# Altium PCB PCB1.PcbDoc
Units mil, origin at the board's own origin, x right, y up, seen from the top; angles counter-clockwise.
Board outline 3151.59 x 3151.59 mil, 2 copper layers (Top Layer, Bottom Layer); 25 components, 7 nets, 53 pads, 0 vias.
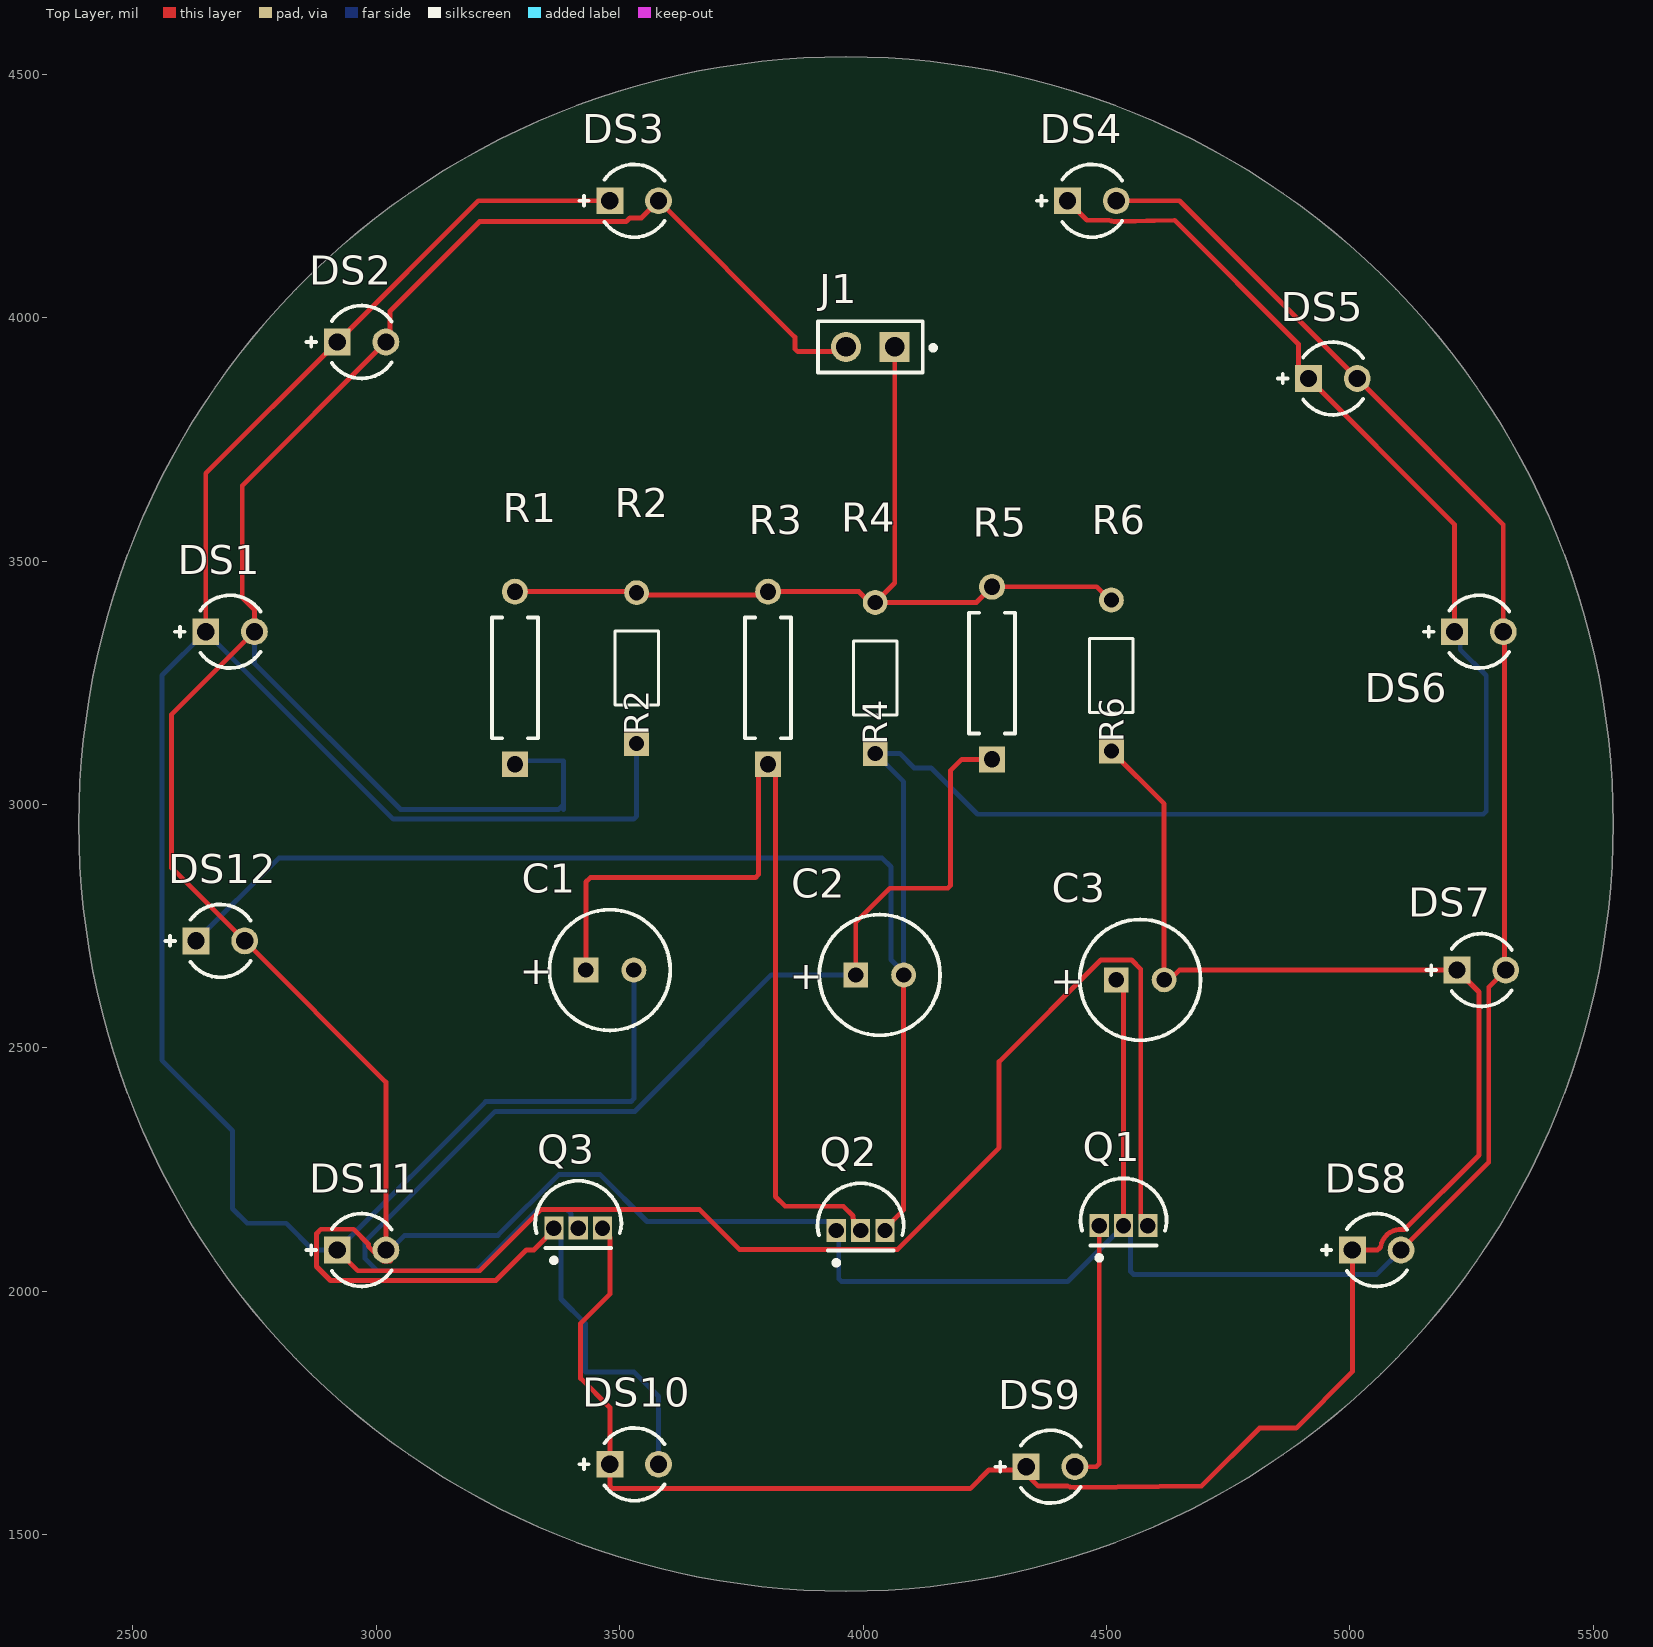
[diagram p0: Top Layer view]
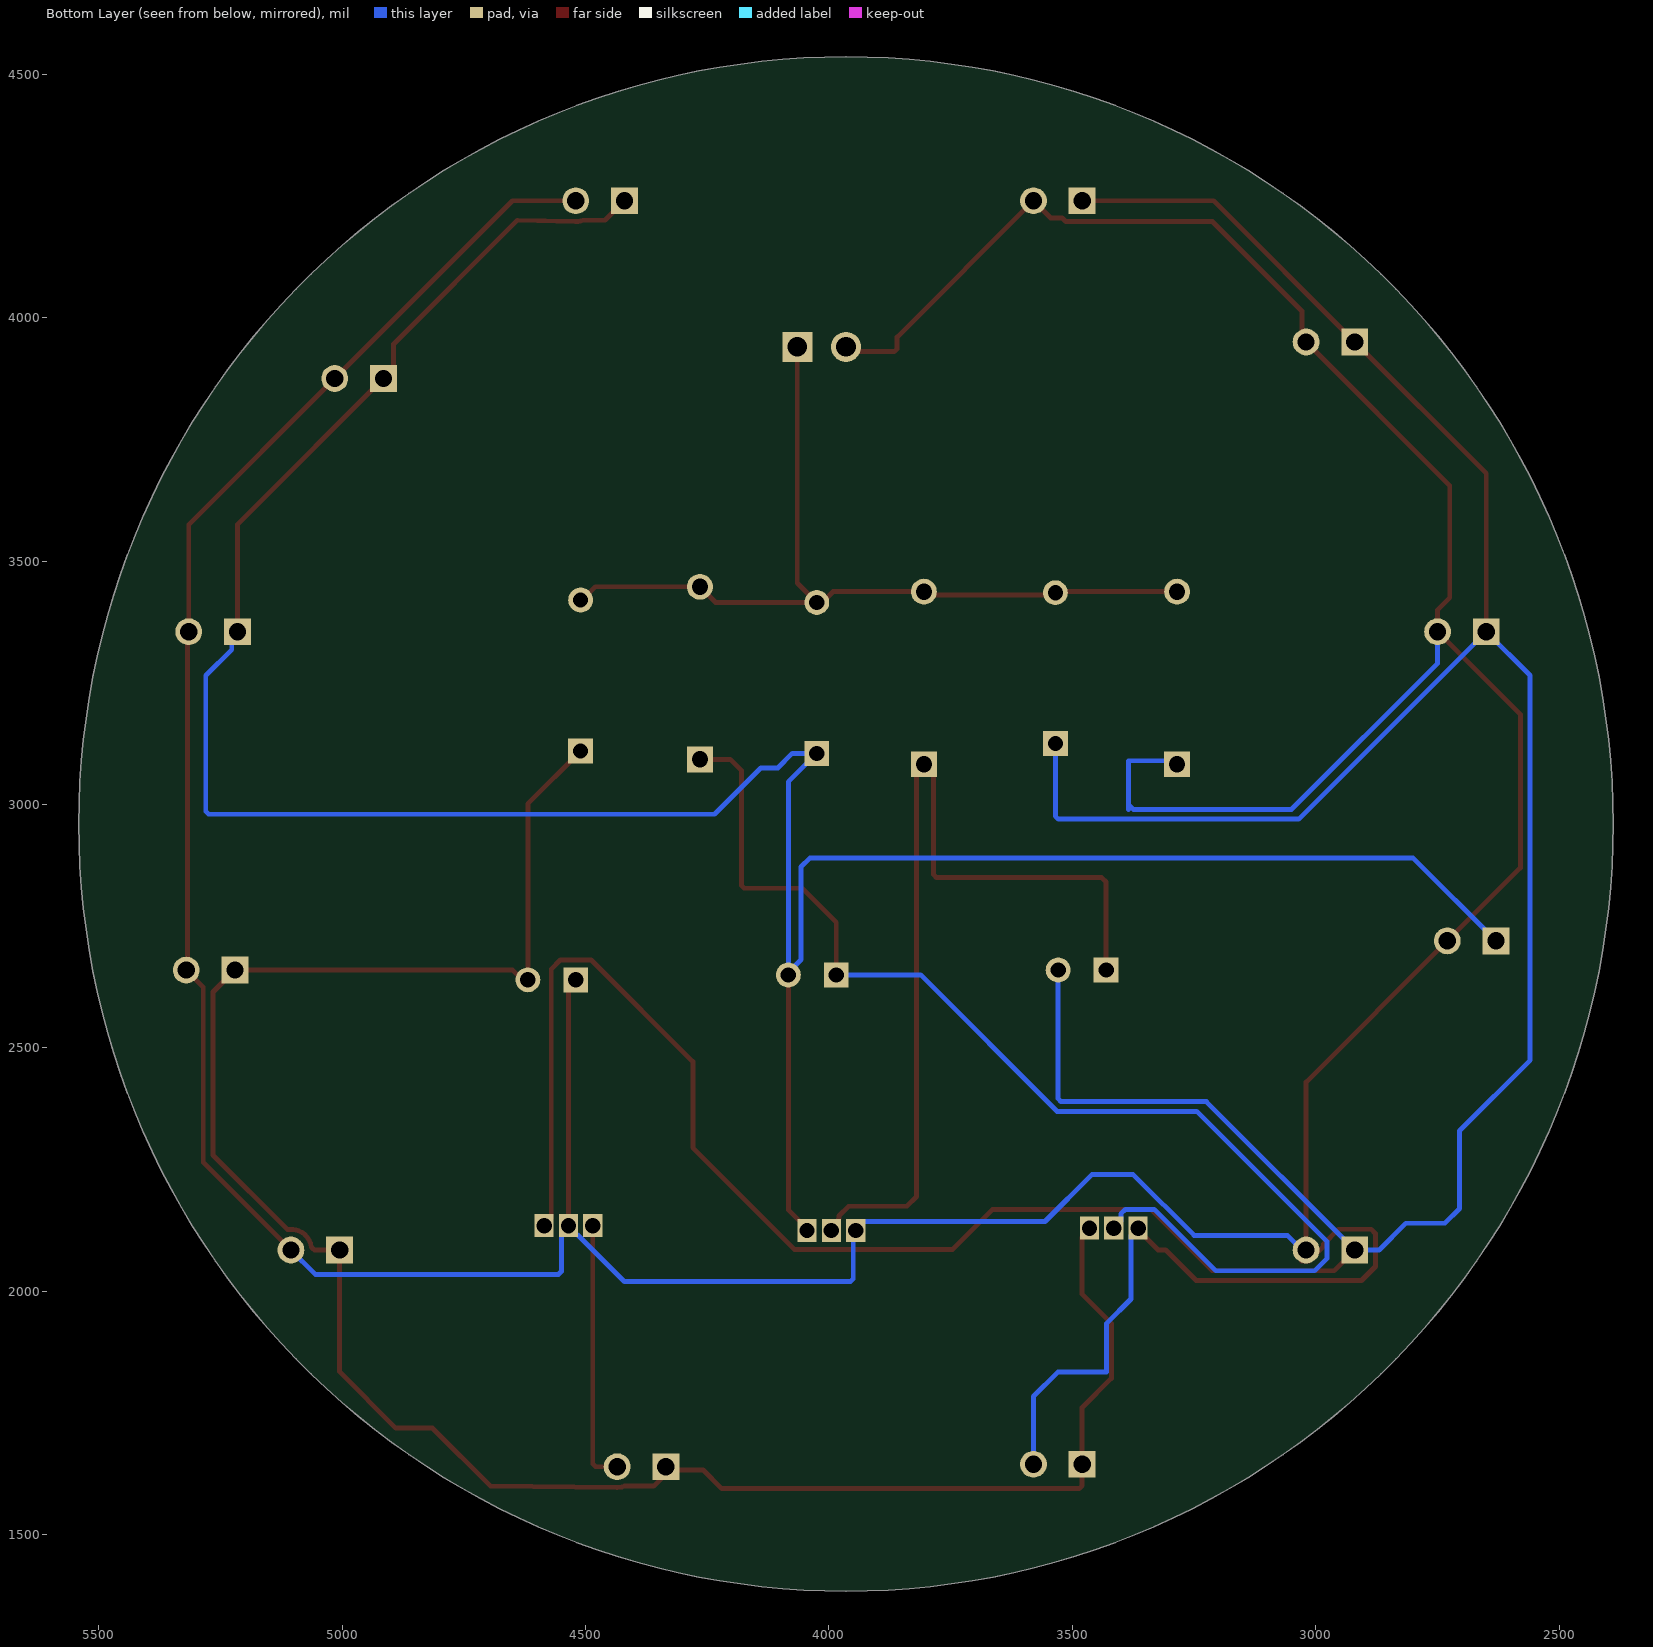
[diagram p1: Bottom Layer view, seen from below]

## Layer stack, top to bottom
Top Solder: solder mask 0.4, Solder Resist, Dk 3.5
Top Layer: signal copper 1.4
Dielectric 1: dielectric 12.6, FR-4, Dk 4.8
Bottom Layer: signal copper 1.4
Bottom Solder: solder mask 0.4, Solder Resist, Dk 3.5

## Board outline
2389.21,2960 ccw(c3965,2960) 3965,1384.21 ccw(c3965,2960) 5540.79,2960 ccw(c3965,2960) 3965,4535.79 ccw(c3965,2960)

## Design rules (kind name [scope] priority, off if disabled: settings)
Clearance [All] p1: gap=10 ignorepadtopadclearanceinfootprint=FALSE
PolygonConnect [All] p1: connectstyle=Relief reliefconductorwidth=10 reliefentries=4 polygonreliefangle="90 Angle" airgapwidth=10
RoutingVias [All] p1: holewidth=28 width=50 viastyle="Through Hole" minholewidth=28 minwidth=50 maxholewidth=28 maxwidth=50
SolderMaskExpansion [All] p1: expansion=0 istentingtop=FALSE
Width [All] p1: maxlimit=10 minlimit=10 preferedwidth=10
30 further rules are at their usual default settings.

## Components (designator, comment, footprint, x,y, rotation, side; value= is the part's Value field where it differs from the comment)
C1 "ECA-2AM220" CAPPR55-250-1120X630X1220 3480,2660 r0 top value=22µF
C2 "ECA-2AM220" CAPPR55-250-1120X630X1220 4034.21,2650 r0 top value=22µF
C3 "ECA-2AM220" CAPPR55-250-1120X630X1220 4569.21,2640 r0 top value=22µF
DS1 "LTL-1CHE" INDPR60-254-520X380X650 2700,3355 r0 top
DS2 "LTL-1CHE" INDPR60-254-520X380X650 2970,3950 r0 top
DS3 "LTL-1CHE" INDPR60-254-520X380X650 3530,4240 r0 top
DS4 "LTL-1CHE" INDPR60-254-520X380X650 4470,4240 r0 top
DS5 "LTL-1CHE" INDPR60-254-520X380X650 4965,3875 r0 top
DS6 "LTL-1CHE" INDPR60-254-520X380X650 5265,3355 r0 top
DS7 "LTL-1CHE" INDPR60-254-520X380X650 5270,2660 r0 top
DS8 "LTL-1CHE" INDPR60-254-520X380X650 5055,2085 r0 top
DS9 "LTL-1CHE" INDPR60-254-520X380X650 4385,1640 r0 top
DS10 "LTL-1CHE" INDPR60-254-520X380X650 3530,1645 r0 top
DS11 "LTL-1CHE" INDPR60-254-520X380X650 2970,2085 r0 top
DS12 "LTL-1CHE" INDPR60-254-520X380X650 2680,2720 r0 top
J1 "TSW-102-22-G-S" FP-TSW-102-22-G-S-MFG 4015,3940 r180 top
Q1 "S9013" JSCJ-TO-92-3_V 4535,2135 r0 top
Q2 "S9013" JSCJ-TO-92-3_V 3995,2125 r0 top
Q3 "S9013" JSCJ-TO-92-3_V 3415,2130 r0 top
R1 "MFR-25FBF52-10K" RESA60-630X240 3285,3260 r90 top value=10k
R2 "CF18JT330R" STA_CF18_STP 3535,3125 r90 top value=330
R3 "MFR-25FBF52-10K" RESA60-630X240 3805,3260 r90 top value=10k
R4 "CF18JT330R" STA_CF18_STP 4025,3105 r90 top value=330
R5 "MFR-25FBF52-10K" RESA60-630X240 4265,3270 r90 top value=10k
R6 "CF18JT330R" STA_CF18_STP 4510,3110 r90 top value=330

## Footprints (in the part's own frame and the unit in brackets; to place one, negate y for a bottom-side part, rotate by r counter-clockwise, add the part's x,y. Pads: shape width x height; smd on the part's side, far side on the other; paste and mask are expansions set on the pad)
CAPPR55-250-1120X630X1220 [mm] "THD, 2-Leads, Dia 6.3mm, Pin Spacing 2.5mm"
  rect 1.3x1.3 hole 0.8: 1(-1.25,0)
  round 1.3 hole 0.8: 2(1.25,0)
  silkscreen extent -3.15,-3.15 3.15,3.15, body extent -3.15,-3.15 3.16,3.15, height 12.21
FP-TSW-102-22-G-S-MFG [mm]
  rect 1.57x1.57 hole 1.02 paste-2539.97 mask+0: 1(-1.27,0)
  round 1.57 hole 1.02 paste-2539.97 mask+0: 2(1.27,0)
  silkscreen extent -3.4,-1.34 2.73,1.34, body extent -2.83,-1.44 2.83,1.44, height 0.25
INDPR60-254-520X380X650 [mm] "THD, 2-Leads, Dia 3.8mm, Pitch 2.54mm"
  rect 1.4x1.4 hole 0.9: 1(-1.27,0)
  round 1.4 hole 0.9: 2(1.27,0)
  silkscreen extent -2.87,-1.9 1.58,1.9, body extent -1.9,-1.9 1.9,1.9, height 6.5
JSCJ-TO-92-3_V [mm] "TO-92, 3-leads, Height 4.7mm, Pitch 1.27mm"
  rect 1x1.2 hole 0.8: 1(-1.27,0) 2(0,0) 3(1.27,0)
  silkscreen extent -2.25,-1.81 2.25,2.47, body extent -2.25,-1.03 2.25,2.47, height 4.7
RESA60-630X240 [mm] "Axial Resistor, 2-Leads, Dia 2.4mm, Body Length 6.3mm"
  rect 1.35x1.35 hole 0.85: 1(-4.5,0)
  round 1.35 hole 0.85: 2(4.5,0)
  silkscreen extent -3.15,-1.2 3.15,1.2, body extent -4.77,-1.19 4.77,1.2, height 2.4
STA_CF18_STP [mil]
  rect 51x51 hole 31 paste-99999 mask+0: 1(0,0)
  round 51 hole 31 paste-99999 mask+0: 2(310,0)
  silkscreen extent 79,-44 231,45, body extent -11,-39 321,39, height 79

## Part data
C1 C2 C3: library part CMP-001-00035-7, "Aluminum Electrolytic Capacitor, 22 uF, +/- 20%, 100 V, -40 to 85 degC, 2-Pin THD, RoHS, Bulk", Capacitor Type=Electrolytic, Case/Package=Radial, Manufacturer=Panasonic, Max Operating Temperature=85°C, Min Operating Temperature=-40°C, Package Description="2-Pin Radial Lead, Dia 6.3 mm, Height 12.2 mm", Package Quantity=200, Package Reference=CAPPR55-250-1120X630X1220, Ripple Current=115mA, Tolerance=20%, Voltage Rating=100V, Datasheet URL=https://industrial.panasonic.com/cdbs/www-data/pdf/RDF0000/ABA0000C1047.pdf, Datasheet Version=Mar-16, Diameter=6.3mm, Lead Pitch=2.5mm, Manufacturer URL=http://www.panasonic.com/, Mounting Technology=TH, Packaging=Bulk, Pins=2, Ripple Current (AC)=115mA, RoHS Compliant=True
DS1 DS2 DS3 DS4 DS5 DS6 DS7 DS8 DS9 DS10 DS11 DS12: library part CMP-007-00018-2, "LED Uni-Color Red, 100 mW, 30 mA, -55 to 100 degC, 2-Pin THD, RoHS, Bulk", Case/Package=Radial, Colour=Red, Forward Current=20mA, Forward Voltage=2V, Manufacturer=Lite-On, Max Operating Temperature=100°C, Min Operating Temperature=-55°C, Package Description="2-Pin Through Hole Device, Dia 3.8 mm, Pitch 2.54 mm", Package Quantity=1000, Datasheet URL=https://datasheet.ciiva.com/15117/getdatasheetpartid-187746-15117985.pdf, Datasheet Version=Dec-03, Illumination Colour=Red, Lens Style=Dome, Luminous Intensity=12.6mcd, Manufacturer URL=http://www.us.liteon.com/, Mounting Technology=TH, Nominal Vf=2V, Package Reference=LTL-1CHE, Packaging=Bulk, Pins=2, RoHS Compliant=True, Viewing Angle=60degrees
J1: library part CMP-002-00072-1, "TSW - Samtec 2.54mm Pin Header 16mm Overall Pin Length 7.62mm Tail (22) - Fast Stock(mcv)", Max Current Rating=7.6A, Max Operating Temperature=125°C, Min Operating Temperature=-55°C, Voltage Rating=550V, Gender=Male, Pins=2
Q1 Q2 Q3: library part CMP-013-00000-3, "Transistor, NPN, 0.1 uA, 150 MHz, 3-Pin TO-92", Case/Package=TO-92-3, Manufacturer="Jiangsu Changjiang Electronics Technology", Package Description="3-Pin Through Hole Device, Height 4.7 mm, Pitch 2.3 mm", Datasheet URL=http://www.cj-elec.com/txUpfile/20121910315050632.pdf, Datasheet Version="Rev. B, 11/2011", Mounting Technology=TH, Package Reference=TO-92-3, RoHS Compliant=False
R1 R3 R5: library part CMP-009-00047-4, "Axial Resistor, 10 KOhm, +/- 1%, 0.25 W, -55 to 155 degC, 2-Pin THD, RoHS, Bulk", Case/Package=Axial, Manufacturer=Yageo, Max Operating Temperature=155°C, Min Operating Temperature=-55°C, Package Description="2-Pin Axial Lead, Dia 2.4 mm, Body Length 6.3 mm", Package Quantity=200, Package Reference=MFR-25, Power=250mW, Tolerance=1%, Voltage Rating=250V, Datasheet URL=http://www.yageo.com/documents/recent/Yageo%20LR_MFR_2013.pdf, Datasheet Version=Apr-13, Manufacturer URL=http://www.yageo.com/, Mounting Technology=TH, Packaging=Bulk, RoHS Compliant=True
R2 R4 R6: library part CMP-009-00177-2, "Fixed Resistor, Carbon Film, 0.125W, 330ohm, 250V, 5% +/-Tol, -400, 0ppm/Cel, Through Hole Mount", Case/Package=Conformal, Max Operating Temperature=155°C, Min Operating Temperature=-55°C, Tolerance=5%, Mounting Technology="Axial, Through Hole"

## Nets (pads, with @x,y where several pads share a name; then routed paths per layer and width w, separated by ;. In a path a pad name is that pad's centre, name@x,y a point inside that pad or via, vN(x,y) a via of type N, cw(c..) or ccw(c..) an arc to the next point about the centre after c; other vN are vias at no path point)
NetC1_1: C1.1 Q2.2 R3.1 | length 1883.1
  Top Layer w10: C1.1 3430.79,2840.79 3440,2850 3779.14,2850 3785,2855.86 3785,3062.83 R3.1 3820,3067.83 3820,2195 3840,2175 3959.52,2175 3979.69,2154.84 3979.69,2149.48 3980.31,2148.85 3980.31,2139.69 Q2.2
NetC1_2: C1.2 DS1.1 DS2.1 DS3.1 DS11.1 Q1.3 R2.1 | length 7762.7
  Top Layer w10: DS1.1 2650,3680 DS2.1 3210,4240 DS3.1 ; DS11.1 2962.56,2042.44 3212.92,2042.44 3339.1,2168.62 3663.88,2168.62 3746.12,2086.38 4070.9,2086.38 4279.55,2295.03 4279.55,2471.94 4488.2,2680.59 4551.8,2680.59 4570.31,2662.08 4570.31,2149.69 Q1.3
  Bottom Layer w10: C1.2 3529.21,2395.65 3523.35,2389.79 3224.79,2389.79 DS11.1 2870,2085 2815,2140 2735,2140 2705,2170 2705,2330 2560,2475 2560,3265 DS1.1 3035,2970 3529.14,2970 3535,2975.86 R2.1
NetC2_1: C2.1 Q3.2 R5.1 | length 2459.2
  Top Layer w10: C2.1 3985,2758.07 4055,2828.07 4174.14,2828.07 4180,2833.93 4180,3070 4202.83,3092.83 R5.1
  Bottom Layer w10: Q3.2 3400.31,2144.69 3400.31,2159.21 3390.9,2168.62 3331.91,2168.62 3205.73,2042.44 3002.37,2042.44 2977.44,2067.37 2977.44,2102.63 3244.61,2369.79 3531.64,2369.79 3811.84,2650 C2.1
NetC2_2: C2.2 DS4.1 DS5.1 DS6.1 DS12.1 Q2.3 R4.1 | length 5783.4
  Top Layer w10: Q2.3 4045,2128.94 4083.43,2167.36 C2.2 ; DS4.1 4460,4200 4505.46,4200 ccw(c4520,4240) 4520.91,4197.45 4640,4200 4894.33,3945.67 4894.33,3895.67 5215,3575 DS6.1
  Bottom Layer w10: DS12.1 2800,2890 4039.14,2890 4057.34,2871.8 4057.34,2681.32 4083.43,2655.24 C2.2 4083.43,3046.57 R4.1 4075,3105 4105,3075 4140,3075 4235,2980 5274.14,2980 5280,2985.86 5280,3265 5226.7,3318.3 5226.7,3343.3 DS6.1
NetC3_1: C3.1 DS1.2 DS2.2 DS3.2 DS4.2 DS5.2 DS6.2 DS7.2 DS8.2 DS9.2 DS10.2 DS11.2 DS12.2 J1.2 Q1.1 Q1.2 Q2.1 Q3.1 R1.1 | length 12147.3
  Top Layer w10: Q3.1 3365,2126.06 3323.94,2085 3308.6,2085 3246.04,2022.44 2906.23,2022.44 2877.44,2051.23 2877.44,2118.77 2886.23,2127.56 2953.77,2127.56 2984.02,2097.31 2984.02,2092.69 3014.27,2062.44 3029.34,2062.44 3029.34,2063.45 3020,2072.79 DS11.2 3020,2430 DS12.2 2580,2870 2580,3185 DS1.2 2750,3400 2725,3425 2725,3655 DS2.2 3028.63,3958.63 3028.63,4013.63 3212.44,4197.44 3513.77,4197.44 3521.33,4205 3545,4205 DS3.2 3860,3960 3860,3935.94 3865.86,3930.09 3955.09,3930.09 J1.2 ; DS9.2 4479.14,1640 4485,1645.86 Q1.1 ; C3.1 4535,2625 Q1.2 ; DS4.2 4650,4240 DS5.2 5315,3575 DS6.2 5317.5,3352.5 5317.5,2662.5 DS7.2 5285,2625 5285,2265 5117.59,2097.59 5117.59,2094.8 DS8.2@5105,2082.21
  Bottom Layer w10: DS1.2 2750,3290 3050,2990 3375,2990 3385,3000 ; DS11.2 3028.42,2085 3058.42,2115 3250,2115 3375,2240 3460,2240 3556.38,2143.62 3930.31,2143.62 3945,2128.94 Q2.1 3950,2120 3950,2025.86 3955.86,2020 4420,2020 4516.38,2116.38 4520.31,2116.38 4535,2131.06 Q1.2 4549.69,2120.31 4549.69,2040.86 4555.54,2035 5055,2035 DS8.2 ; R1.1 3292.17,3090 3385,3090 3385,3000 ; Q3.1 3379.69,2115.31 3379.69,1984.45 3429.76,1934.37 3429.76,1834.21 3529.92,1834.21 3580,1784.14 DS10.2 ; 3385,2990 3385,3000
NetC3_2: C3.2 DS7.1 DS8.1 DS9.1 DS10.1 Q3.3 R6.1 | length 4369.9
  Top Layer w10: Q3.3 3465,2126.06 3480,2111.06 3480,1994.55 3420,1934.55 3420,1821.52 3480,1761.52 DS10.1 3480,1600.86 3485.86,1595 4220,1595 4258.3,1633.3 4328.3,1633.3 DS9.1 4342.56,1617.44 4360,1600 4420.46,1600 ccw(c4435,1640) 4435.42,1597.44 4695,1600 4814.33,1719.33 4889.33,1719.33 5005,1835 DS8.1 5053.4,2085 5056.58,2085 5059.18,2086.84 ccw(c5053.4,2095) 5063.21,2093.08 cw(c5105,2085) 5107.98,2127.45 5108.31,2127.45 5112.45,2127.45 5265,2280 5265,2615 DS7.1 4649.57,2660 4629.57,2640 C3.2 4618.43,3001.57 R6.1
NetJ1_1: J1.1 R1.2 R2.2 R3.2 R4.2 R5.2 R6.2 | length 1804.8
  Top Layer w10: R1.2 3532.83,3437.17 R2.2@3536.42,3433.58 ; R2.2@3536.42,3430 3797.83,3430 R3.2 3991.74,3437.17 4013.91,3415 R4.2 ; J1.1 4065,3455 R4.2 ; R6.2 4507.06,3420 4479.89,3447.17 R5.2 4232.83,3415 R4.2

## Silkscreen, mask and mechanical layers (free items; w line width, h text height)
Mechanical 1:
  circle w10: c3965,2960 r1575.79

## Text inside footprints (layer, text, board x,y; h text height)
C1: Top Overlay "+" at 3294.97,2630.47 h59.06
C2: Top Overlay "+" at 3849.19,2620.47 h59.06
C3: Top Overlay "+" at 4384.19,2610.47 h59.06